# Altium PCB bottom_power_supply_pcb_circular.pcbdoc
Units mm, origin at the board's own origin, x right, y up, seen from the top; angles counter-clockwise.
Board outline 99.8 x 100 mm, 2 copper layers (Top Layer, Bottom Layer), stack 1.671 mm thick; 28 components, 41 nets, 139 pads, 5 vias.
Unrouted connection lines stored in the file: 2.
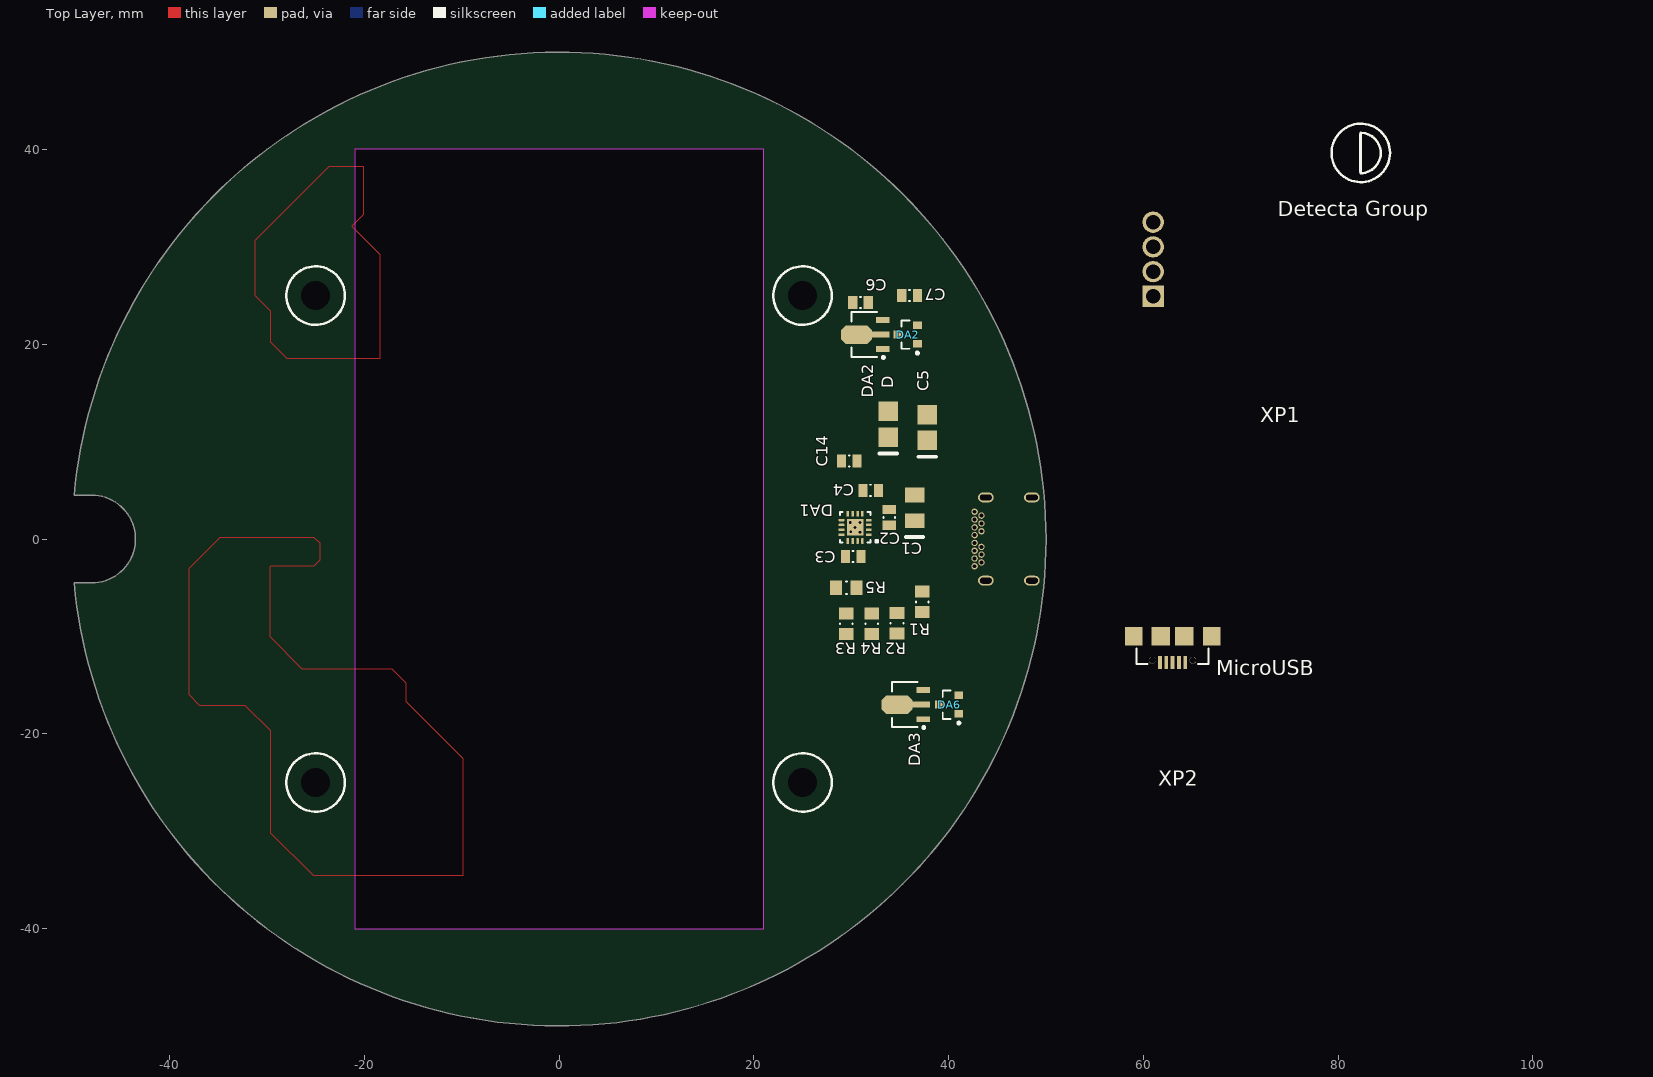
[diagram p0: Top Layer view]
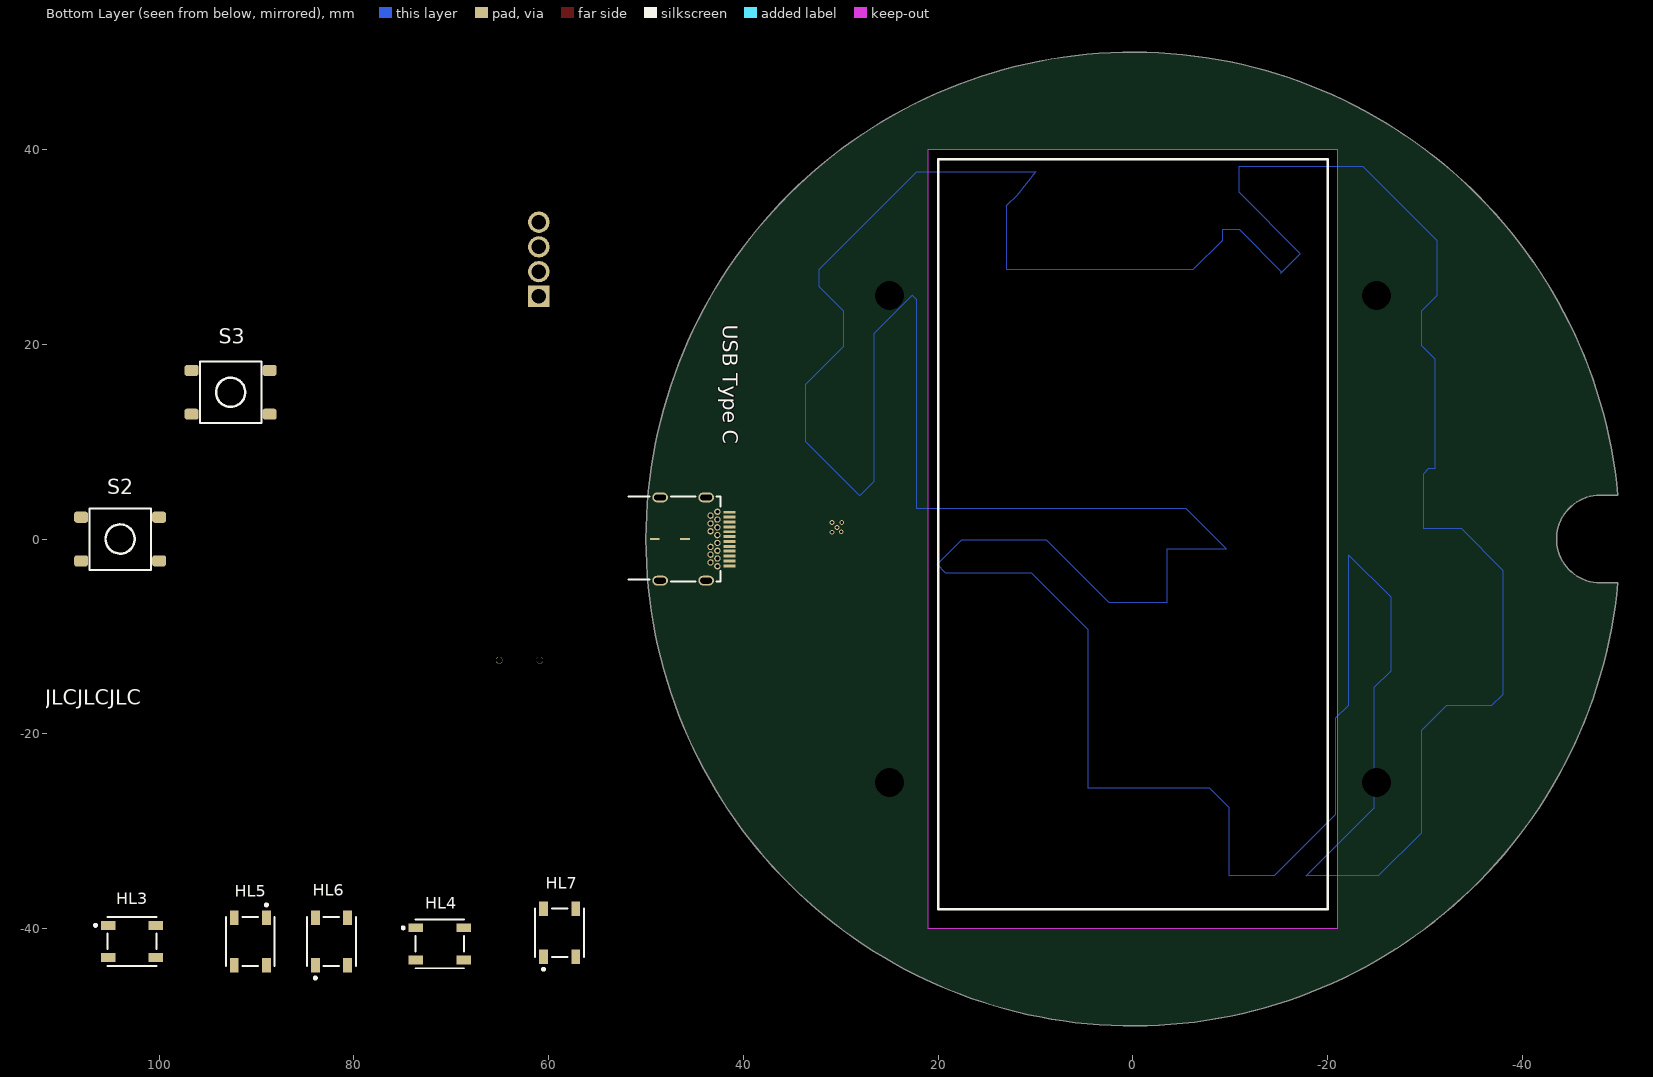
[diagram p1: Bottom Layer view, seen from below]

## Layer stack, top to bottom
Top Solder: solder mask 0.0102, Solder Resist, Dk 3.5
Top Layer: signal copper 0.0356
Dielectric 1: dielectric 1.6, FR-4, Dk 4.8
Bottom Layer: signal copper 0.0356
Bottom Solder: solder mask 0.0102, Solder Resist, Dk 3.5

## Board outline
-49.798,-4.5 -48,-4.5 ccw(c-48,0) -48,4.5 -49.797,4.5 -49.797,4.496 cw(c0,0) -30,40 cw(c0,0)
cut-out: -21,40 -21,-40 21,-40 21,40

## Design rules (kind name [scope] priority, off if disabled: settings)
Clearance Polygons [InNet('GND')] p1: gap=0.4 ignorepadtopadclearanceinfootprint=FALSE
Clearance [All] p2: gap=0.254 ignorepadtopadclearanceinfootprint=FALSE
PolygonConnect [All] p1: connectstyle=Relief reliefconductorwidth=0.254 reliefentries=4 polygonreliefangle="90 Angle" airgapwidth=0.254
RoutingVias [All] p1: holewidth=0.711 width=1.27 viastyle="Through Hole" minholewidth=0.711 minwidth=1.27 maxholewidth=0.711 maxwidth=1.27
SolderMaskExpansion [All] p1: expansion=0.102
Width [All] p1: maxlimit=5 minlimit=0.2 preferedwidth=0.254
30 further rules are at their usual default settings.

## Classes and differential pairs
component class dAir: C1 C2 C4 C5 C6 C7 C14 DA1 DA2 DA3 HL3 HL7 R1 R2 R3 R4 R5

## Components (designator, comment, footprint, x,y, rotation, side; value= is the part's Value field where it differs from the comment)
C1 "47uF" KEMT-A-3216-18-2_M#1 36.5,3.2 r90 top
C2 "4.7uF" CAPC0805(2012)155_L 33.9,2.225 r90 top
C3 "1uF" CAPC0805(2012)155_L 30.2,-1.8 r0 top value=4.7uF
C4 "4.7uF" CAPC0805(2012)155_L 32,5 r0 top
C5 "47uF" KEMT-A-3216-18-2_M#2 37.8,11.45 r90 top
C6 "1uF" CAPC0805(2012)155_L 30.95,24.3 r0 top value=4.7uF
C7 "1uF" CAPC0805(2012)155_L 36,25 r180 top value=4.7uF
C14 "0.1uF" CAPC0805(2012)155_L 29.8,8 r180 top value=4.7uF
D "47uF" KEMT-A-3216-18-2_M#2 33.8,11.775 r90 top (schematic designator C5)
DA1 "BQ24075" RGT0016C_V 30.4,1.2 r180 top
DA2 "" ONSC-SOT-23-3-318-08_V 35.8,21 r180 top
DA2 "HT7530" SOT89_N 31.35,21 r180 top
DA3 "HT7530" SOT89_N 35.5,-17 r180 top
DA6 "" ONSC-SOT-23-3-318-08_V 40.05,-17 r180 top
HL3 "WS2812B" ADAI-WS2812B_V 102.775,-41.325 r180 bottom
HL4 "WS2812B" ADAI-WS2812B_V 71.175,-41.575 r180 bottom
HL5 "WS2812B" ADAI-WS2812B_V 90.625,-41.325 r270 bottom
HL6 "WS2812B" ADAI-WS2812B_V 82.3,-41.325 r90 bottom
HL7 "WS2812B" ADAI-WS2812B_V 58.875,-40.425 r90 bottom
MicroUSB "Comment" 629105136821 63,-10 r180 top
R1 "1k" RESC0805(2012)_M 37.3,-6.45 r270 top value="4.30 Ohm"
R2 "1k" RESC0805(2012)_M 34.7,-8.65 r270 top value="4.30 Ohm"
R3 "1k" RESC0805(2012)_M 29.5,-8.7 r270 top value="4.30 Ohm"
R4 "1k" RESC0805(2012)_M 32.1,-8.7 r270 top value="4.30 Ohm"
R5 "0" RESC0805(2012)_M 29.5,-5 r0 top value="4.30 Ohm"
S2 "Comment" DIPT-DTSM-6_V 104,0 r180 bottom
S3 "Comment" DIPT-DTSM-6_V 92.65,15.065 r0 bottom
"USB Type C" "Comment" 632723300011 47.35,0 r270 bottom

## Footprints (in the part's own frame and the unit in brackets; to place one, negate y for a bottom-side part, rotate by r counter-clockwise, add the part's x,y. Pads: shape width x height; smd on the part's side, far side on the other; paste and mask are expansions set on the pad)
629105136821 [mm] "Micro USB 2.0 SMT Type B Horizontal 5 Contacts"
  rect 0.4x1.35 smd: 1(-1.3,2.675) 2(-0.65,2.675) 3(0,2.675) 4(0.65,2.675) 5(1.3,2.675)
  round 0.7 hole 0.7 unplated: MH1(-2.075,2.45) MH2(2.075,2.45)
  rect 1.8x1.9 smd: Shell(-4,0) Shell(4,0)
  rect 1.9x1.9 smd: Shell(-1.2,0) Shell(1.2,0)
  silkscreen extent -3.7,1.25 3.7,2.85, body extent -4,-2.73 4,3.17, height 2.69
632723300011 [mm] "USB 3.1 Type C Receptacle Horizontal THR"
  rect 0.3x1.2 smd: A1(-2.75,5.93) A2(-2.25,5.93) A3(-1.75,5.93) A4(-1.25,5.93) A5(-0.75,5.93) A6(-0.25,5.93) A7(0.25,5.93) A8(0.75,5.93) A9(1.25,5.93) A10(1.75,5.93) A11(2.25,5.93) A12(2.75,5.93)
  round 0.65 hole 0.4: B1(2.8,4.68) B2(2.4,3.98) B3(1.6,3.98) B4(1.2,4.68) B5(0.8,3.98) B6(0.4,4.68) B7(-0.4,4.68) B8(-0.8,3.98) B9(-1.2,4.68) B10(-1.6,3.98) B11(-2.4,3.98) B12(-2.8,4.68) G1(2,4.68) G2(-2,4.68)
  oval 1x1.6 hole 0.6 slot 1.2 at 90 deg: Shell(-4.27,-1.2) Shell(-4.27,3.53) Shell(4.27,-1.2) Shell(4.27,3.53)
  rect 0.2x1 smd: Shell(0,-1.75) Shell(0,1.35)
  silkscreen extent -4.37,-4.45 4.34,5, body extent -4.37,-5.6 4.37,6.19, height 3.05
ADAI-WS2812B_V [mm] "SMD, 4-Leads, Body 5x5mm, Pitch 3.3mm"
  rect 1.5x0.9 smd: 1(-2.45,1.65) 2(-2.45,-1.65) 3(2.45,-1.65) 4(2.45,1.65)
  silkscreen extent -3.88,-2.5 2.5,2.5, body extent -2.7,-2.5 2.7,2.5, height 1.69
CAPC0805(2012)155_L [mm] "Chip Capacitor, Body 2.0x1.2mm, Height 1.55mm, IPC High Density"
  rect 0.95x1.35 smd: 1(-0.8,0) 2(0.8,0)
  silkscreen extent -0.05,-0.57 0.05,0.57, body extent -1.1,-0.72 1.1,0.72, height 1.55
DIPT-DTSM-6_V [mm] "Switch, Through-Hole, 4 Leads, Body 8.5x8.5mm, Row Spacing 9.0mm, Pitch 4.5mm"
  rrect50% 1.448x1.143 smd: 1(4.01,-2.25) 2(-4,-2.25) 3(4.01,2.24) 4(-4,2.24)
  silkscreen extent -3.16,-3.16 3.15,3.15, body extent -4.5,-3.1 4.5,3.1, height 4.5
KEMT-A-3216-18-2_M#1 [mm] "Molded TAN Capacitor, 2-Leads, Body 3.4x1.8mm, IPC Low Density"
  rect 1.5x2 smd: 1(-1.325,0) 2(1.325,0)
  silkscreen extent -3,-0.9 -3,0.9, body extent -1.7,-0.9 1.7,0.9, height 1.8
KEMT-A-3216-18-2_M#2 [mm] "Molded TAN Capacitor, 2-Leads, Body 3.4x1.8mm, IPC Low Density"
  rect 2x2 smd: 1(-1.325,0) 2(1.325,0)
  silkscreen extent -3,-0.9 -3,0.9, body extent -1.7,-0.9 1.7,0.9, height 1.8
ONSC-SOT-23-3-318-08_V [mm] "SOT23, 3-Leads, Body 2.92x1.3mm, Pitch 0.95mm"
  rect 0.9x0.8 smd: 1(-1,0.95) 2(-1,-0.95) 3(1,0)
  silkscreen extent -1.13,-1.46 0.65,2.02, body extent -0.65,-1.46 0.65,1.46, height 1.11
RESC0805(2012)_M [mm] "Chip Resistor, Body 2.0x1.3mm, IPC Low Density"
  rect 1.25x1.5 smd: 1(-1.05,0) 2(1.05,0)
  silkscreen extent -0.05,-0.65 0.05,0.65, body extent -1.1,-0.67 1.1,0.67, height 0.7
RGT0016C_V [mm] "QFN, 16-Leads, Body 3x3mm, Pitch 0.5mm, Thermal Pad 1.65x1.65mm"
  rrect40% 0.6x0.25 smd: 1(-1.4,0.75) 2(-1.4,0.25) 3(-1.4,-0.25) 4(-1.4,-0.75) 9(1.4,-0.75) 10(1.4,-0.25) 11(1.4,0.25) 12(1.4,0.75)
  rrect40% 0.25x0.6 smd: 5(-0.75,-1.4) 6(-0.25,-1.4) 7(0.25,-1.4) 8(0.75,-1.4) 13(0.75,1.4) 14(0.25,1.4) 15(-0.25,1.4) 16(-0.75,1.4)
  rrect6% 1.7x1.7 smd paste-0.85: 17(0,0)
  rrect6% 1.55x1.55 on Top Paste: 17(0,0)
  silkscreen extent -2.35,-1.58 1.57,1.58, body extent -1.5,-1.5 1.5,1.5, height 1
SOT89_N [mm] "SOT89, 3-Leads, Body 4.5x2.4 mm, Pitch 1.5mm, Lead Span 4.1mm, IPC Medium Density"
  rect 1.4x0.6 smd: 1(-1.9,1.5) 3(-1.9,-1.5)
  rect 1.8x0.6 smd: 2(-1.7,0)
  oct 3.2x1.9 smd: 2(0.8,0)
  silkscreen extent -2.08,-2.3 1.3,2.47, body extent -1.3,-2.3 1.29,2.3, height 1.6

## Part data
C1 C5 D: library part CMP-2000-05172-1, Capacitance=10µF, ESR (Equivalent Series Resistance)=3.8Ohm, Lifetime @ Temp.=2000Hrs@85degC, Manufacturer=Kemet, Manufacturer Size Code=A, Operating Temperature=-55degC~125degC, Package / Case=1206(3216Metric), Package Description="2-Pin Surface Mount Device, Body 3.2 x 1.6 mm", Package Reference=1206, Standard Package=2,000, Tolerance=±10%, Voltage - Rated=10V, Catalog Drawings=T49x,T5xxSeries_A-side1T49x,T5xxSeries_A,B-side2T49x,T5xxSeries_A,SBottom, Category=Capacitors, Datasheet URL=http://www.farnell.com/datasheets/1824869.pdf, Datasheet Version=Apr-14, Family=TantalumCapacitors, Features=GeneralPurpose, Height - Seated (Max)="0.071\"(1.80mm)", Lead Spacing=-, Manufacturer URL=http://www.kemet.com/, Mounting Type=SurfaceMount, Online Catalog=T491Series, Other Names=399-3684-2, Packaging=Tape&Reel(TR), Product Training Modules=CapacitorBasics-TypicalUsesforCapacitorsDeratingGuidelinesforSurfaceMountTantalumCapacitors, Series=T491, Size / Dimension="0.126\"Lx0.063\"W(3.20mmx1.60mm)", Type=Molded
C2 C3 C4 C6 C7 C14: library part CMP-1036-04882-1, "CAP 4.7uF 10V ±10% 0805 (2012 Metric) Thickness 1.55mm SMD", Case-EIA=0805, Case-Metric=2012, Rated Voltage="10 V", Tolerance=A±10%, Max Thickness="1.55 mm", Technology=SMT
DA1: library part CMP-0321-00238-2, "USB-Friendly Li-Ion Battery Charger and Power-Path Management IC, Vout 5.5 V, 4.3 V, -40 to 85 degC, 16-pin QFN (RGT), Green (RoHS & no Sb/Br)", Manufacturer="Texas Instruments", Over Voltage Protection=N, PartNumber=BQ24075RGTR, Code_JEDEC=MO-220, ComponentLink1Description=Datasheet, ComponentLink1URL=http://www.ti.com/general/docs/lit/getliterature.tsp?genericPartNumber=BQ24075&fileType=pdf, DatasheetVersion=SLUS810G, Eco-Plan="Green (RoHS & no Sb/Br)", Lead Acid=N, Li-Ion=N, Li-Polymer=N, Mounting Technology="Surface Mount", NiCd=N, NiMH=N, PackageDescription="16-Pin Plastic Quad Flat No-Lead, 3 x 3 mm Body, 0.5 mm Pitch, 1.7 x 1.7 mm Exposed Pad", PackageReference=RGT0016C, PackageVersion="revH, Oct-2011", SubFamily="Battery Charge Management", Vin(Min)(V)=4.3
DA2 DA6: library part CMP-1048-00737-1, "General Purpose Transistor, NPN Silicon, 3-Pin SOT-23, Pb-Free, Tape and Reel", Manufacturer="On Semiconductor", PartNumber=BC817-25LT1G, ComponentLink1Description="Manufacturer URL", ComponentLink1URL=http://www.onsemi.com/, ComponentLink2Description=Datasheet, ComponentLink2URL=http://www.onsemi.com/pub_link/Collateral/BC817-16LT1-D.PDF, ComponentLink3Description="Package Specification", ComponentLink3URL=http://www.onsemi.cn/pub_link/Collateral/318-08.PDF, DatasheetVersion="Rev. 12", fT Min (MHz)=100, IC Continuous (A)=0.5, Mounting Technology="Surface Mount", PackageDescription="3-Pin Small Outline Transistor, Body 2.92 x 1.3 mm, Pitch 0.95 mm", PackageReference=SOT-23-3-318-08, PackageVersion="Rev. AP, 11/2009", Packing="Tape and Reel", Polarity=NPN, RoHS=TRUE
DA2 DA3: library part CMP-0204-00106-1, "100mA Low Power LDO, Output Voltage 3.0V, SOT89 Pkg", Code_IPC=SOT89, DatasheetVersion="Rev1.80, Mar-2010", PackageDescription="3-Pin SOT-89 Package 1.5 mm Pitch, 4.1 mm Lead Span", PackageReference=SOT89, PackageVersion=May-2010
HL3 HL4 HL5 HL6 HL7: library part CMP-1740-00005-1, "Intelligent Control LED Integrated Light Source, 3.5 to 5.3 V, -25 to 80 degC, 4-Pin SMD, RoHS, Bulk", Case\Package=Radial, Current Rating="240 mA", Max Operating Temperature="125 degC", Min Operating Temperature="-55 degC", Package Quantity=200, Tolerance=10%, ComponentLink1Description="Manufacturer URL", ComponentLink1URL=https://www.adafruit.com/, ComponentLink2Description=Datasheet, ComponentLink2URL=https://cdn-shop.adafruit.com/datasheets/WS2812B.pdf, DatasheetVersion=May-13, Height="12.2 mm", Lead Pitch="5 mm", Length="12.2 mm", Mount="Through Hole", PackageDescription="4-Pin Surface Mount Device, Body 5 x 5 mm, Pitch 3.3 mm", PackageReference=WS2812B, Packaging=Bulk, Pins=2, Radiation Hardening=No, REACH SVHC="No SVHC", RoHSCompliant=true, Shielding=Unshielded
R1 R2 R3 R4 R5: library part CMP-1013-00017-1, Case-EIA=0805, Case-Metric=2012, Power="0.125 W", Tolerance="5 %", Technology=SMT

## Free pads (board coordinates)
  rect 2.2x2.2 hole 1.5: 1(61,24.92)
  round 2.2 hole 1.5: 2(61,27.46) 3(61,30) 4(61,32.54)
  round 0 hole 3: 9(-25,-25) 9(-25,25) 9(25,-25) 9(25,25)

## Via types
v1: diameter 0.5, hole 0.3, Top Layer to Bottom Layer, 5 vias

## Nets (pads, with @x,y where several pads share a name; then routed paths per layer and width w, separated by ;. In a path a pad name is that pad's centre, name@x,y a point inside that pad or via, vN(x,y) a via of type N, cw(c..) or ccw(c..) an arc to the next point about the centre after c; other vN are vias at no path point)
3V: C7.2 C14.2 DA2.2@36.8,21.95 DA2.3@33.25,22.5
5V: C3.1 D.1 DA1.13 MicroUSB.5 R1.1 R5.2
+E: C4.1 C5.1 DA1.5 DA1.10 DA1.11 HL3.1 HL4.1 HL5.1 HL6.1 HL7.1 R5.1
GND: C1.2 C2.2 C3.2 C4.2 C5.2 C6.1 C7.1 C14.1 D.2 DA1.4 DA1.6 DA1.8 DA1.14 DA1.15 DA1.17@30.4,1.2 DA2.1 DA3.1 DA6.1 HL3.3 HL4.3 HL5.3 HL6.3 HL7.3 R2.2 R3.2 R4.2
  other v1: 30.9,0.7 29.95,0.75 30.4,1.2 29.9,1.7 30.9,1.7
NetBAT1_1: C1.1 C2.1 DA1.2 DA1.3
NetC6_2: C6.2 DA2.2@30.55,21 DA2.2@33.05,21 DA2.3@34.8,21 DA3.2 DA6.3
NetC13_1: 
NetC15_2: 
NetC17_1: 
NetC17_2: 
NetC18_1: 
NetC21_1: 
NetDA1_1: DA1.1 R1.2 R2.1
NetDA1_7: DA1.7
NetDA1_9: DA1.9
NetDA1_12: DA1.12 R3.1
NetDA1_16: DA1.16 R4.1
NetDA4_1: 
NetDD1_7: 
NetDD1_9: 
NetDD1_12: S2.1 S2.2
NetDD1_25: 
NetDD1_26: 
NetDD1_27: 
NetDD1_33: 
NetDD1_34: pad.1
NetDD1_35: pad.2
NetDD1_36: 
NetHL1_1: 
NetHL2_1: 
NetHL3_2: HL3.2 HL7.4
NetHL3_4: HL3.4
NetLS1_2: 
NetR13_1: 
NetR13_2: pad.4
NetR14_1: 
NetR14_2: pad.3
NetR15_2: 
NetR16_2: 
NetR22_2: 
"V ESP": DA3.3 DA6.2
pads on no net: "USB Type C.A1" "USB Type C.A2" "USB Type C.A3" "USB Type C.A4" "USB Type C.A5" "USB Type C.A6" "USB Type C.A7" "USB Type C.A8" "USB Type C.A9" "USB Type C.A10" "USB Type C.A11" "USB Type C.A12" "USB Type C.B1" "USB Type C.B2" "USB Type C.B3" "USB Type C.B4" "USB Type C.B5" "USB Type C.B6" "USB Type C.B7" "USB Type C.B8" "USB Type C.B9" "USB Type C.B10" "USB Type C.B11" "USB Type C.B12" "USB Type C.G1" "USB Type C.G2" "USB Type C.Shell" DA1.17@30.4,1.2 HL4.2 HL4.4 HL5.2 HL5.4 HL6.2 HL6.4 HL7.2 MicroUSB.1 MicroUSB.2 MicroUSB.3 MicroUSB.4 MicroUSB.MH1 MicroUSB.MH2 MicroUSB.Shell S2.3 S2.4 S3.1 S3.2 S3.3 S3.4

## Polygon pours and split planes (outlines as drawn)
GND on Top Layer "GND_L01_P002" (solid, remove dead copper, shelved, pour order 2): -23.6,38.3 -20.1,38.3 -20.1,33.3 -21.287,32.113 -18.4,29.225 -18.4,18.5 -27.9,18.5 -29.6,20.2 -29.6,23.4 -31.2,25 -31.2,30.7
GND on Top Layer "NONET_L01_P004" (solid, remove dead copper, shelved, pour order 4): -15.745,-14.755 -15.745,-16.655 -9.9,-22.5 -9.9,-34.6 -25.2,-34.6 -29.6,-30.2 -29.6,-22.7 -29.6,-19.7 -32.2,-17.1 -36.9,-17.1 -38,-16 -38,-3 -34.8,0.2 -25.2,0.2 -24.6,-0.4 -24.6,-2.2 -25.2,-2.8 -29.6,-2.8 -29.7,-2.9 -29.7,-10 -26.4,-13.3 -17.2,-13.3
GND on Bottom Layer "GND_L02_P000" (solid, remove dead copper, shelved, pour order 0): -25.2,-34.6 -17.8,-34.6 -24.8,-27.6 -24.8,-15.2 -26.5,-13.5 -26.5,-6 -22.147,-1.647 -22.1,-1.694 -22.1,-17.123 -20.8,-18.423 -20.8,-28.3 -14.5,-34.6 -9.9,-34.6 -9.9,-27.588 -7.912,-25.6 4.6,-25.6 4.6,-19.7 4.6,-9.3 10.4,-3.5 19.2,-3.5 20.1,-2.6 17.594,-0.094 8.908,-0.094 2.502,-6.5 -3.5,-6.5 -3.5,-1.008 -9.534,-1.008 -9.565,-0.977 -5.488,3.1 22.2,3.1 22.2,24.577 22.662,25.038 26.6,21.1 26.6,5.865 28.033,4.433 33.6,10 33.6,15.9 29.7,19.8 29.7,23.4 32.2,25.9 32.2,27.7 22.2,37.7 10,37.7 11.95,35.25 13,34.2 13,27.7 -6.2,27.7 -9.2,30.7 -9.2,31.8 -10.9,31.8 -15.179,27.521 -15.179,27.279 -17.2,29.3 -10.9,35.6 -10.9,38.3 -23.6,38.3 -31.2,30.7 -31.2,25 -29.6,23.4 -29.6,19.9 -31,18.5 -31,7.206 -30.347,7.206 -29.807,6.666 -29.807,1.1 -31,1.1 -33.7,1.1 -38,-3.2 -38,-16 -36.8,-17.123 -32.177,-17.123 -29.6,-19.7 -29.6,-30.2

## Silkscreen, mask and mechanical layers (free items; w line width, h text height)
Top Overlay:
  circle w0.254: c82.325,39.65 r3
  circle w0.254: c-25,-25 r3
  circle w0.254: c25,-25 r3
  circle w0.254: c25,25 r3
  circle w0.254: c-25,25 r3
  lines w0.254: 82.3,37.566 ccw(c82.3,39.638) 82.3,41.709
  lines w0.3: 82.3,37.7 82.3,41.575
  text "Detecta Group" at 73.775,33.125 h1.52
  text "XP1" at 72,12 h1.52
  text "XP2" at 61.55,-25.325 h1.52
  text "dAir_board v 1.1.1" at 129,-29 h1.52
Bottom Overlay:
  lines w0.254: -20,-38 20,-38 20,39 -20,39 -20,-38
  text "JLCJLCJLCJLC" at 115,-17 h1.52
Mechanical 1:
  lines w1: -49.798,-4.5 -48,-4.5 ccw(c-48,0) -48,4.5 -49.797,4.5 ; -49.797,-4.5 ccw(c0,0) -30,40 ccw(c0,0) -49.797,4.496

## Text inside footprints (layer, text, board x,y; h text height)
MicroUSB: Mechanical 2 "PCB Edge" at 64.2,-7.9 h0.41 r180
"USB Type C": Mechanical 2 "PCB Edge" at 52.95,1.7 h0.61 r90